# Altium PCB SPI LVDS Peripheral.PcbDoc
Units mil, origin at the board's own origin, x right, y up, seen from the top; angles counter-clockwise.
Board outline 2032.72 x 1617.57 mil, 4 copper layers (Top Layer, L2 - GND, L3 - GND, Bottom Layer), stack 61.811 mil thick; 29 components, 19 nets, 94 pads, 97 vias.
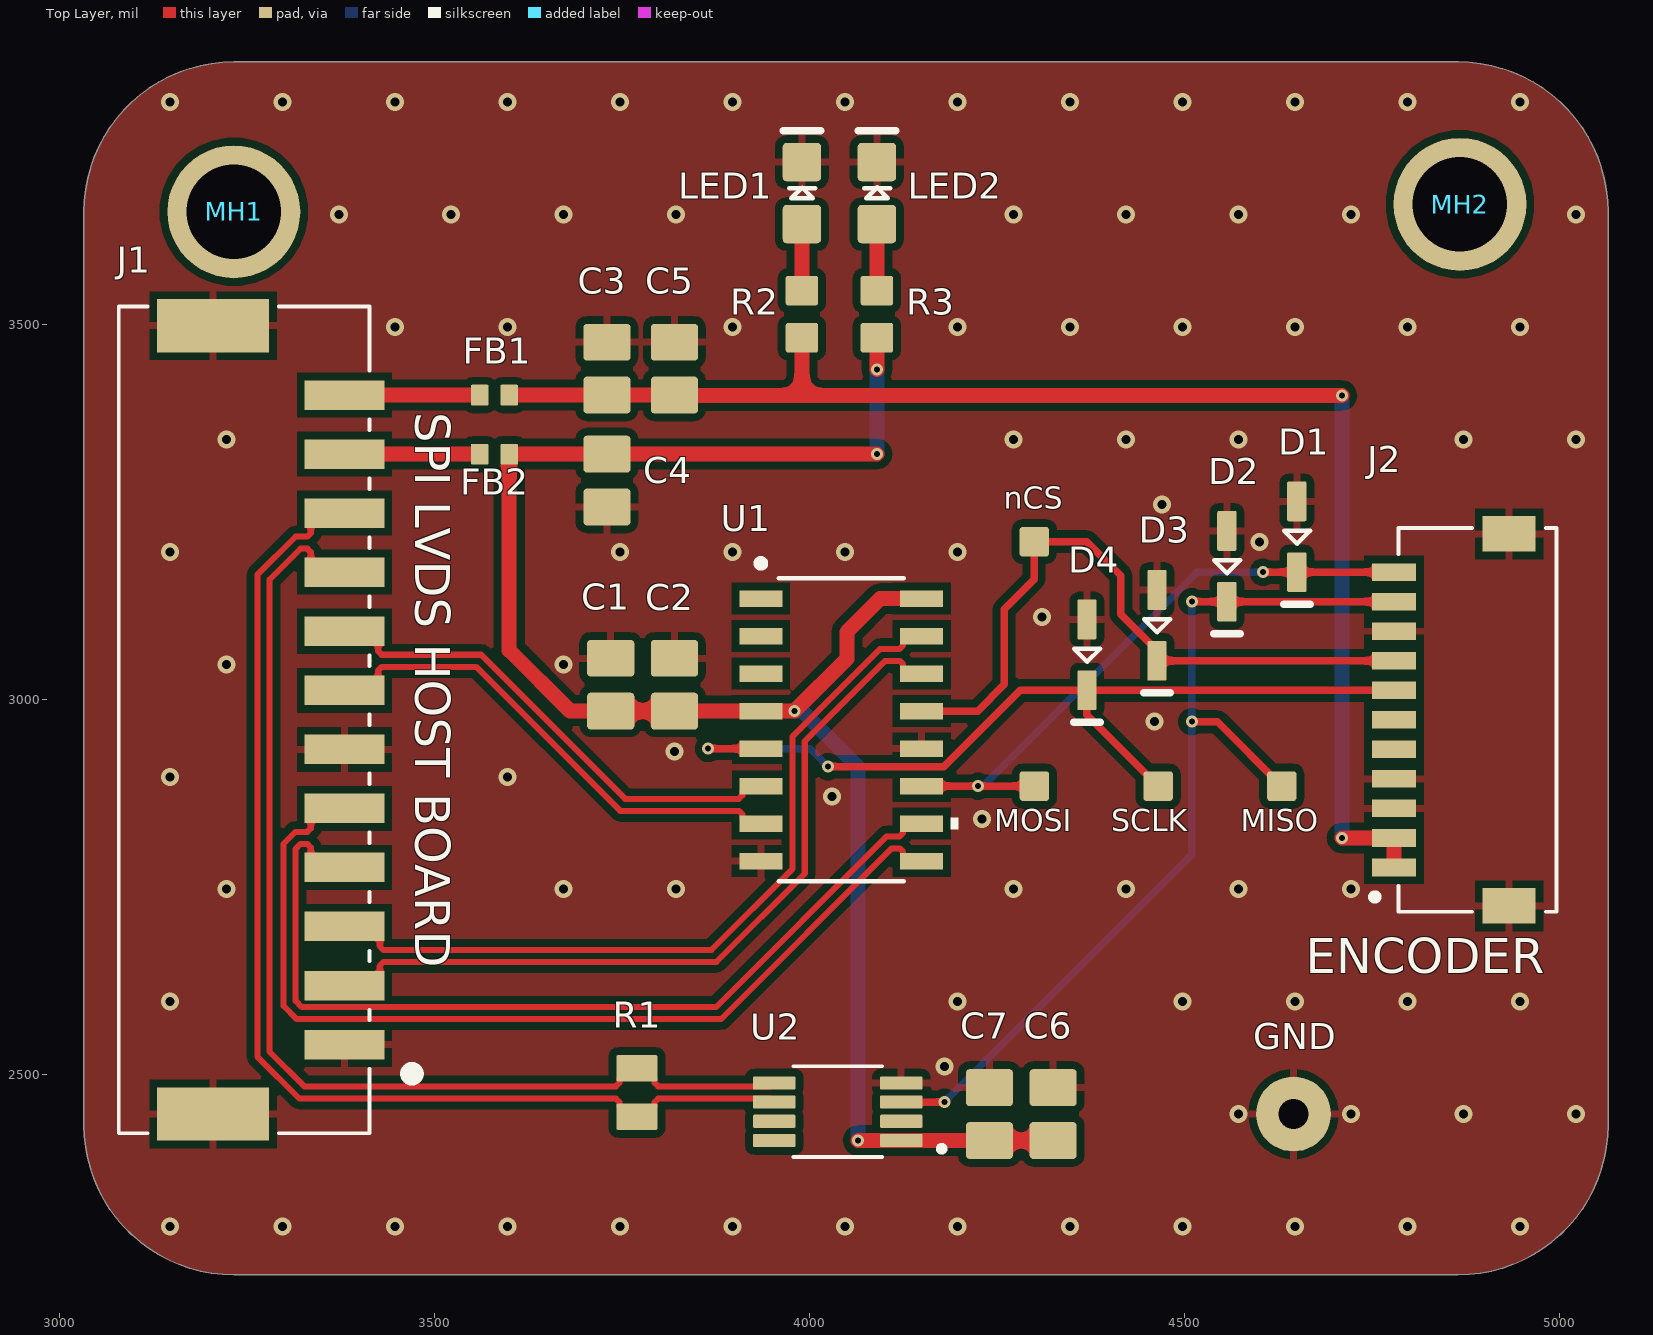
[diagram p0: Top Layer view]
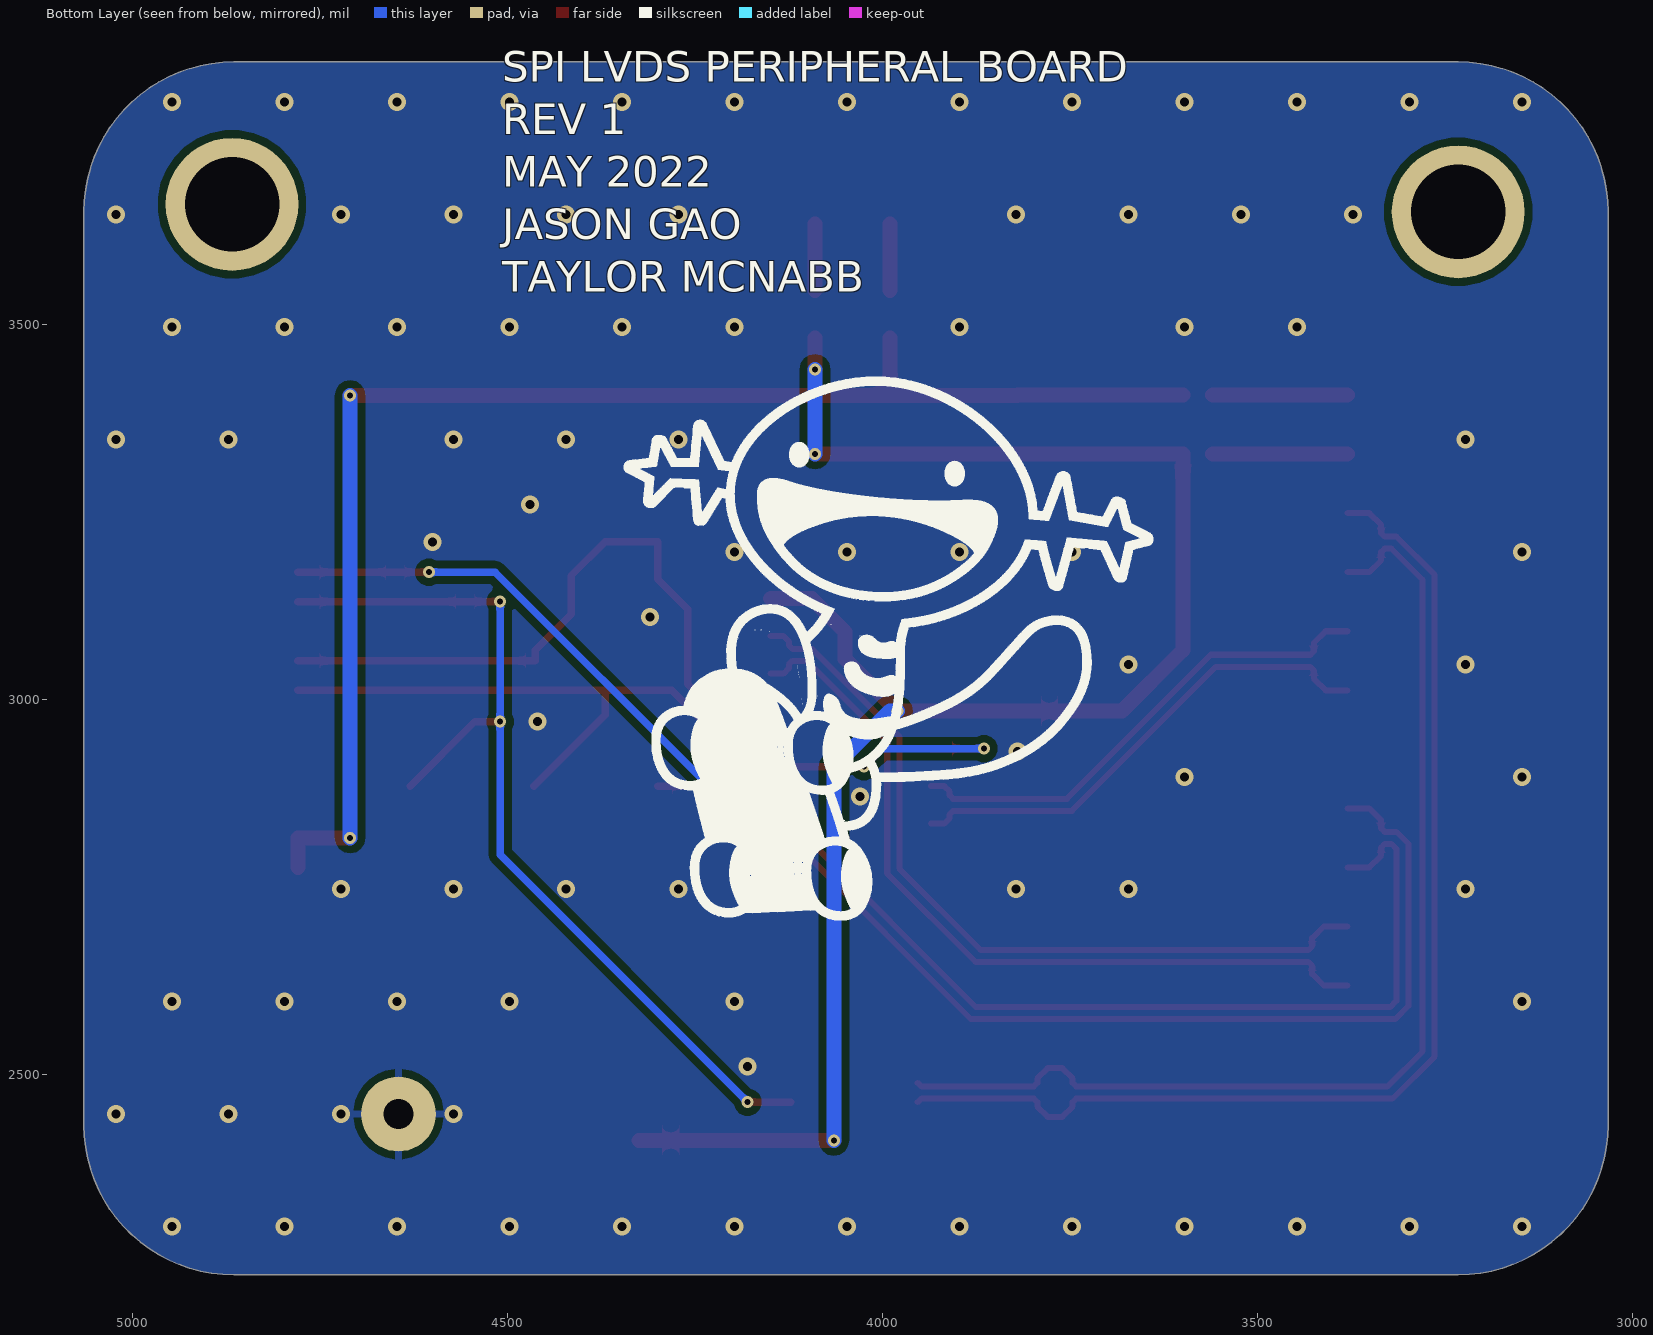
[diagram p1: Bottom Layer view, seen from below]
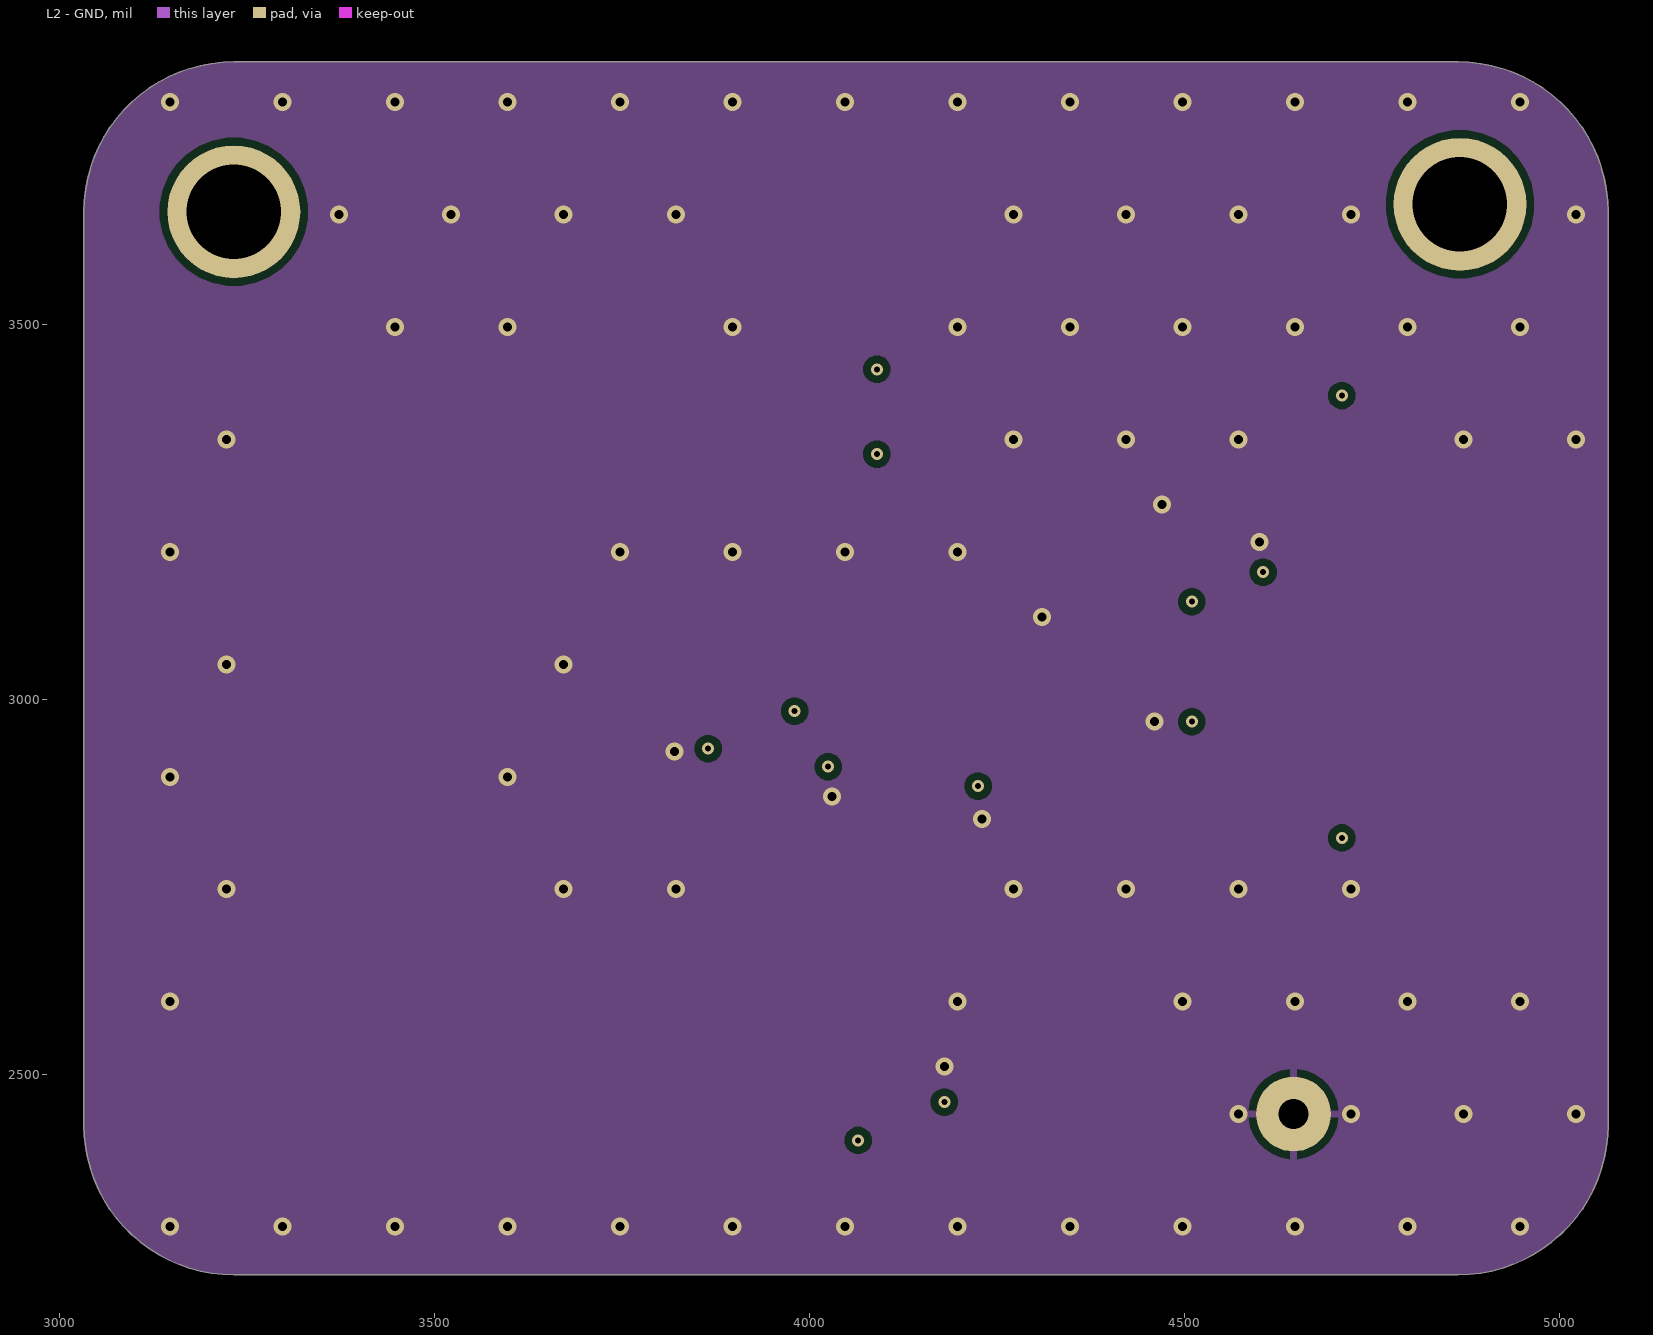
[diagram p2: L2 - GND]
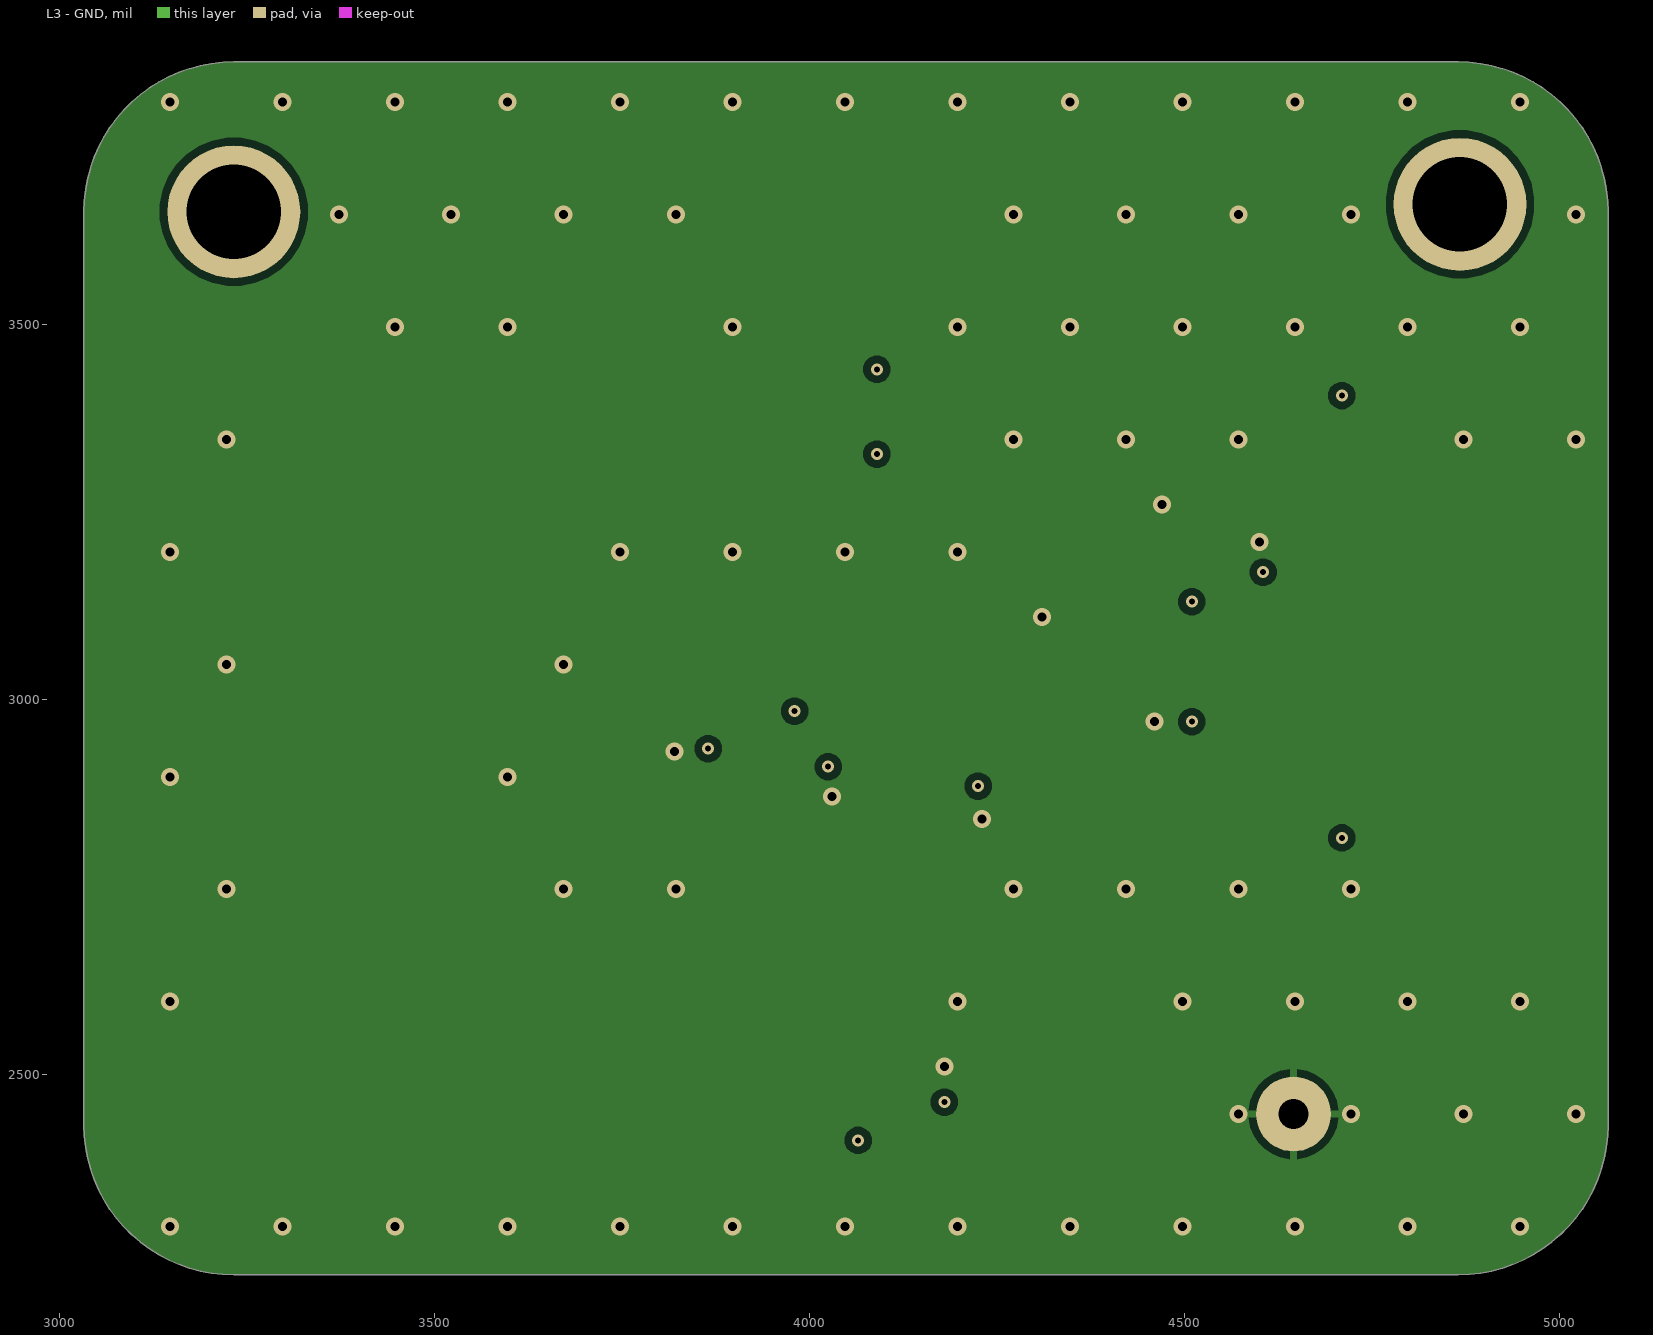
[diagram p3: L3 - GND]
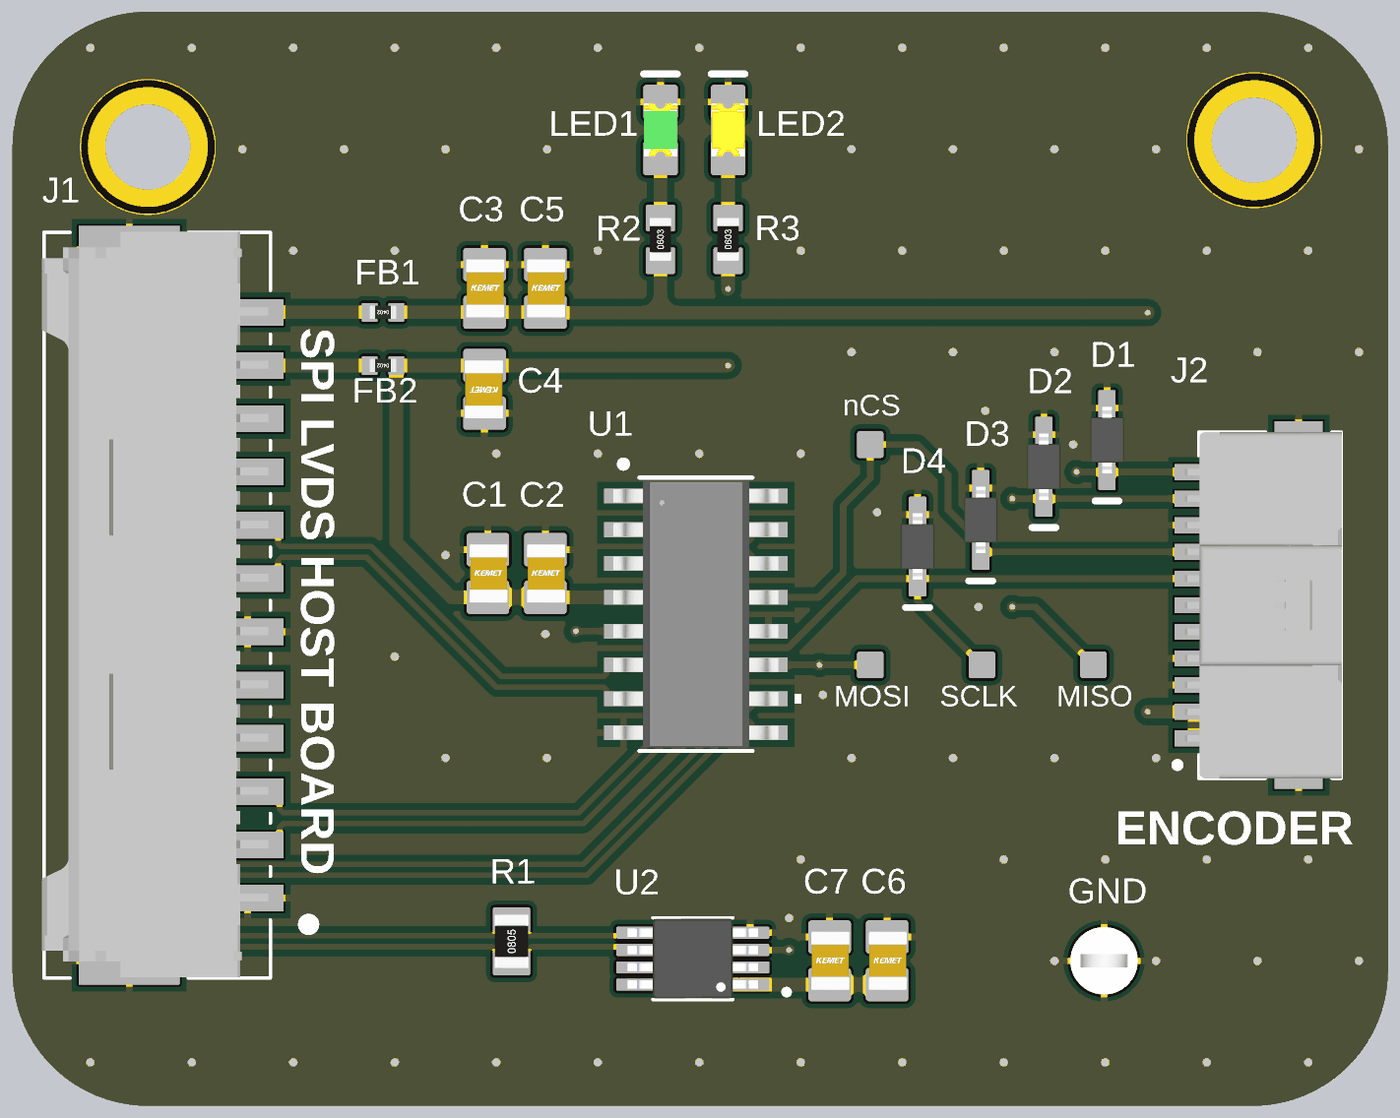
[diagram p4: 3D render of the assembled board from above, using the file's embedded part models]

## Layer stack, top to bottom
Top Solder: solder mask 0.5, Solder Resist, Dk 3.8
Top Layer: signal copper 1.378
Dielectric 1: prepreg 7.874, 7628, Dk 4.6
L2 - GND: signal copper 0.689
Core: core 41.929, FR-4, Dk 4.5
L3 - GND: signal copper 0.689
Dielectric 2: prepreg 7.874, 7628, Dk 4.6
Bottom Layer: signal copper 1.378
Bottom Solder: solder mask 0.5, Solder Resist, Dk 3.8

## Board outline
3032.43,2432.43 3032.43,3650 cw(c3232.43,3650) 3232.43,3850 4865.15,3850 cw(c4865.15,3650) 5065.15,3650 5065.15,2432.43 cw(c4865.15,2432.43) 4865.15,2232.43 3232.43,2232.43 cw(c3232.43,2432.43)

## Design rules (kind name [scope] priority, off if disabled: settings)
Clearance "Stitching No Net_1" [IsStitchingVia and InNet('No Net') vs (IsVia and (Not IsStitchingVia)) Or IsPad] p1: gap=5 ignorepadtopadclearanceinfootprint=FALSE
Clearance "Stitching No Net" [IsStitchingVia and InNet('No Net') vs (IsVia and (Not IsStitchingVia)) Or IsPad] p2: gap=5 ignorepadtopadclearanceinfootprint=FALSE
Clearance Clearance_Differential [InAnyDifferentialPair] p3: gap=10 ignorepadtopadclearanceinfootprint=FALSE except(0: Arc-Hole Track-Hole SMDPad-Hole THPad-Hole Via-Hole Fill-Hole Poly-Hole Region-Hole Text-Hole; 5: Arc-Arc Arc-Track Arc-SMDPad Track-Track Track-SMDPad SMDPad-SMDPad)
Clearance [All] p4: gap=10 ignorepadtopadclearanceinfootprint=FALSE except(0: Arc-Hole Track-Hole SMDPad-Hole THPad-Hole Via-Hole Fill-Hole Poly-Hole Region-Hole Text-Hole; 5: Arc-SMDPad Track-SMDPad SMDPad-SMDPad)
DiffPairsRouting [All] p1: maxlimit=8 minlimit=8 mostfreqgap=8 toplayer_minwidth=8.08 toplayer_maxwidth=8.08 toplayer_prefwidth=8.08 midlayer1_minwidth=8.08 midlayer1_maxwidth=8.08 midlayer1_prefwidth=8.08 midlayer2_minwidth=8.08 midlayer2_maxwidth=8.08 midlayer2_prefwidth=8.08 bottomlayer_minwidth=8.08 bottomlayer_maxwidth=8.08 bottomlayer_prefwidth=8.08 maxuncoupledlength=500
HoleSize [All] p1: absolutevalues=TRUE maxlimit=200 minlimit=1 maxpercent=80.000 minpercent=20.000
MinimumSolderMaskSliver [All] p1: minsoldermaskwidth=6
PolygonConnect [All] p1: thpad.connectstyle=Relief thpad.reliefconductorwidth=10 thpad.reliefentries=4 thpad.polygonreliefangle="90 Angle" thpad.airgapwidth=10 smdpad.connectstyle=Relief smdpad.reliefconductorwidth=10 smdpad.reliefentries=4 smdpad.polygonreliefangle="90 Angle" smdpad.airgapwidth=10 via.connectstyle=Direct via.reliefconductorwidth=10 via.reliefentries=4 via.polygonreliefangle="90 Angle" via.airgapwidth=10
RoutingVias [All] p1: holewidth=28 width=50 viastyle="Through Hole" minholewidth=8 minwidth=16 maxholewidth=28 maxwidth=50
SilkToSilkClearance [All] p1: silktosilkclearance=6
SilkToSolderMaskClearance [IsPad] p1: minsilkscreentomaskgap=1 clearancetoexposedcopper=TRUE
SolderMaskExpansion [All] p1: expansion=4 istentingtop=FALSE
Width "Power Width" [InNet('3V3') Or InNet('5V')] p1: maxlimit=20 minlimit=20 preferedwidth=20
Width [All] p2: maxlimit=100 minlimit=10 preferedwidth=10
25 further rules are at their usual default settings.

## Classes and differential pairs
differential pair SCLK: +SCLK_P -SCLK_N
differential pair nCS: +nCS_P -nCS_N
differential pair MOSI: +MOSI_P -MOSI_N
differential pair MISO: +MISO_P -MISO_N

## Components (designator, comment, footprint, x,y, rotation, side; value= is the part's Value field where it differs from the comment)
C1 "CAP_1000pF_50V_0805" CAP2012 3735,3019.42 r270 top value=1000pF
C2 "CAP_0.1uF_50V_0805" CAP2012 3820,3019.42 r270 top value=0.1μF
C3 "CAP_0.1uF_50V_0805" CAP2012 3730,3440.88 r270 top value=0.1μF
C4 "CAP_0.1uF_50V_0805" CAP2012 3730,3291.67 r90 top value=0.1μF
C5 "CAP_0.1uF_50V_0805" CAP2012 3820,3440.88 r270 top value=0.1μF
C6 "CAP_1000pF_50V_0805" CAP2012 4325,2446.85 r270 top value=1000pF
C7 "CAP_0.1uF_50V_0805" CAP2012 4240,2446.85 r270 top value=0.1μF
D1 "TVS_DIODE_UNIDIR_5V" SOD-323 4650,3216.67 r270 top
D2 "TVS_DIODE_UNIDIR_5V" SOD-323 4556.67,3177.3 r270 top
D3 "TVS_DIODE_UNIDIR_5V" SOD-323 4463.33,3098.56 r270 top
D4 "TVS_DIODE_UNIDIR_5V" SOD-323 4370,3059.19 r270 top
FB1 "FERRITE_BEAD_600OHM_0402" RES0402 3580,3405.64 r180 top
FB2 "FERRITE_BEAD_600OHM_0402" RES0402 3580,3326.9 r180 top
GND "TESTPOINT_LOOP" TESTPOINT_LOOP 4645.55,2446.85 r0 top (schematic designator TP5)
J1 "CON_12M_SM_RA_2mm" MOLEX-5024941270 3375,2540.64 r90 top
J2 "CON_12M_SM_RA" MOLEX-5015681107 4880,2972.57 r90 top
LED1 "LED_GREEN" LED_0805_GREEN 3990,3675 r90 top
LED2 "LED_YELLOW" LED_0805_YELLOW 4090,3675 r90 top
MH1 "MOUNTING_HOLE_M3" MOUNTING_HOLE_3mm#1 3230,3650 r0 top
MH2 "MOUNTING_HOLE_M3" MOUNTING_HOLE_3mm#2 3965,3660 r0 top
MISO "TESTPOINT_1MM_SQUARE" TESTPOINT_SQUARE_1MM#1 4630,2884.18 r90 top (schematic designator TP3)
MOSI "TESTPOINT_1MM_SQUARE" TESTPOINT_SQUARE_1MM#2 4300,2885.56 r90 top (schematic designator TP4)
nCS "TESTPOINT_1MM_SQUARE" TESTPOINT_SQUARE_1MM#1 4300,3210 r90 top (schematic designator TP2)
R1 "RES_100Ω_0805_1%" RES0805 3770,2475.59 r90 top value=100Ω
R2 "RES_220Ω_0603_5%" RES0603 3990,3482.01 r90 top value=220Ω
R3 "RES_100Ω_0603_1%" RES0603 4090,3482.01 r90 top value=100Ω
SCLK "TESTPOINT_1MM_SQUARE" TESTPOINT_SQUARE_1MM#1 4465,2884.18 r90 top (schematic designator TP1)
U1 "SN65LVDS33MDREP" SOIC127P600X175-16N 4042.43,2959.18 r0 top
U2 "SN65LVDS179MDGKREP" SOP65P490X110-8N 4037.79,2450 r180 top

## Footprints (in the part's own frame and the unit in brackets; to place one, negate y for a bottom-side part, rotate by r counter-clockwise, add the part's x,y. Pads: shape width x height; smd on the part's side, far side on the other; paste and mask are expansions set on the pad)
CAP2012 [mm]
  rrect20% 1.25x1.6 smd: 1(-0.895,0) 2(0.895,0)
  body extent -1.1,-0.7 1.1,0.75, height 1.41
LED_0805_GREEN [mm] "SMD, 2-Leads, Body 2x1.25mm"
  rrect20% 1.3x1.3 smd: 1(-1.05,0) 2(1.05,0)
  silkscreen extent -0.18,-0.63 2.11,0.64, body extent -1,-0.62 1,0.63, height 1.12
LED_0805_YELLOW [mm] "SMD, 2-Leads, Body 2x1.25mm"
  rrect20% 1.3x1.3 smd: 1(-1.05,0) 2(1.05,0)
  silkscreen extent -0.18,-0.63 2.11,0.64, body extent -1,-0.62 1,0.63, height 1.12
MOLEX-5015681107 [mm]
  rect 0.6x1.5 smd mask+0: 1(-5,2.55) 2(-4,2.55) 3(-3,2.55) 4(-2,2.55) 5(-1,2.55) 6(0,2.55) 7(1,2.55) 8(2,2.55) 9(3,2.55) 10(4,2.55) 11(5,2.55)
  rect 1.2x1.8 smd mask+0: S1(6.3,-1.35) S2(-6.3,-1.35)
  silkscreen extent -6.5,-2.95 6.5,3.3, body extent -6.5,-2.98 6.5,2.93, height 4.61
MOLEX-5024941270 [mm]
  rect 1.8x3.8 smd paste+0 mask+0.076: 0(-2.379,4.323) 0(24.321,4.323)
  rect 1x2.7 smd paste+0 mask+0.076: 1(-0.029,-0.127) 2(1.971,-0.127) 3(3.971,-0.127) 4(5.971,-0.127) 5(7.971,-0.127) 6(9.971,-0.127) 7(11.971,-0.127) 8(13.971,-0.127) 9(15.971,-0.127) 10(17.971,-0.127) 11(19.971,-0.127) 12(21.971,-0.127)
  silkscreen extent -3.03,-2.61 24.97,7.52, body extent -3,-0.9 25,7.6, height 6.76
MOUNTING_HOLE_3mm#1 [mm] "3mm Hole"
  round 4.5 hole 3.2 mask+0.3: 0(0.062,0)
MOUNTING_HOLE_3mm#2 [mm] "3mm Hole"
  round 4.5 hole 3.2 mask+0.3: 0(22.925,0)
RES0402 [mm] "Chip Resistor, Body 1x0.5mm, IPC Medium Density"
  rrect15% 0.6x0.7 smd: 1(-0.5,0) 2(0.5,0)
  body extent -0.5,-0.25 0.5,0.25, height 0.27
RES0603 [mm] "Chip Resistor, Body 1.6x0.8mm, IPC Medium Density"
  rrect15% 1x1.1 smd: 1(0,0) 2(1.6,0)
  body extent 0,-0.4 1.6,0.4, height 0.46
RES0805 [mm] "Chip Resistor, 2-Leads, Body 2.00x1.25mm, IPC High Density"
  rrect15% 0.9x1.4 smd: 1(-0.825,0) 2(0.825,0)
  body extent -1,-0.62 1,0.63, height 0.61
SOD-323 [mm]
  rrect15% 1.35x0.65 smd: 1(-1.2,0) 2(1.2,0)
  silkscreen extent -0.21,-0.45 2.29,0.45, body extent -1.24,-0.62 1.24,0.62, height 1.1
SOIC127P600X175-16N [mil]
  rect 57.28x21.97 smd paste+0 mask+0: 1(-107.14,175) 2(-107.14,125) 3(-107.14,75) 4(-107.14,25) 5(-107.14,-25) 6(-107.14,-75) 7(-107.14,-125) 8(-107.14,-175) 9(107.14,-175) 10(107.14,-125) 11(107.14,-75) 12(107.14,-25) 13(107.14,25) 14(107.14,75) 15(107.14,125) 16(107.14,175)
  silkscreen extent -112,-202 156,227, body extent -122,-197 122,197, height 69
SOP65P490X110-8N [mm]
  rrect25% 1.45x0.45 smd: 1(-2.15,0.975) 2(-2.15,0.325) 3(-2.15,-0.325) 4(-2.15,-0.975) 5(2.15,-0.975) 6(2.15,-0.325) 7(2.15,0.325) 8(2.15,0.975)
  silkscreen extent -3.62,-1.54 1.5,1.54, body extent -2.45,-1.5 2.45,1.5, height 1.1
TESTPOINT_LOOP [mm]
  round 2.54 hole 1.02: 1(0,0)
  body extent -1.27,-1.27 1.27,1.27, height 4.57
TESTPOINT_SQUARE_1MM#1 [mm]
  rrect20% 1x1 smd: 1(0,0)
TESTPOINT_SQUARE_1MM#2 [mm]
  rrect20% 1x1 smd: 1(-0.035,0)

## Part data
C1 C6: "CAP CER 1000pF 50V X7R 0805", Dielectric=X7R, Manufacturer 1=Samsung, Manufacturer Part Number 1=CL21B102KBANNNC, Package/Footprint=0805, Supplier Part Number 1=1276-1020-1-ND, Voltage Rating=50V, Mounting Type=SMD, Supplier 1=Digi-Key
C2 C3 C4 C5 C7: "CAP CER 0.1UF 50V X7R 0805", Dielectric=X7R, LCSC Part #=C49678, Manufacturer 1=KEMET, Manufacturer Part Number 1=C0805C104K5RAC7411, Package/Footprint=0805, Supplier Part Number 1=80-C0805C104K5RACLR, Voltage Rating=50V, Mounting Type=SMD, Supplier 1=Mouser
D1 D2 D3 D4: "TVS DIODE 5VWM 12VC SOD-323-2", Clamping Voltage-Max=12V, Manufacturer 1=Nexperia, Manufacturer Part Number 1=PESD5V0L1UA, Min Breakdown Voltage="6.8 V", Supplier Part Number 1=771-PESD5V0L1UA115, Supplier 1=Mouser
FB1 FB2: "FIXED IND 1UH 3.8A 33 MOHM SMD", Current Rating (Max)=300mA, DC Resistance (DCR) (Max)=520mΩ, Impedance @ Frequency="600Ω @ 100 MHz", Manufacturer 1="TDK Corporation", Manufacturer Part Number 1=MMZ1005S601CT000, Package=0402, Package/Footprint=SMD, Supplier Part Number 1=445-2162-1-ND, Impedance=600Ω, Mounting Type=SMD, Supplier 1=Digi-Key
GND: "TESTPOINT THRUHOLE", Manufacturer 1="Keystone Electronics", Manufacturer Part Number 1=5002, Package/Footprint=TH, Supplier Part Number 1=36-5002-ND, Mounting Type=TH, Supplier 1=Digi-Key
J1: "2.00mm Pitch CLIK-Mate Wire-to-Board PCB Receptacle, Single Row, Right-Angle, 12 Circuits", Color=Natural,White, Contact Resistance=20mR, Current Rating=3A, Flammability Rating="UL94 V-0", Housing Color=Natural, Insulation Resistance=1GR, Manufacturer=Molex, Manufacturer Part Number=502494-1270, Max Operating Temperature=85°C, Max Voltage Rating (AC)=250V, Min Operating Temperature=-25°C, Package Quantity=950, Category="Headers and Wire Housings", Connector Type=Receptacle, Contact Gender=Female, Contact Material="Copper Alloy", Contact Plating=Tin, Contact Type="Center Strip Contact", Depth=6.85mm, Family=CLIK-Mate, Fastening Type=Latch, Gender=Receptacle, Glow Wire Compliant=Non-compliant, Housing Material=PBT, Lead Pitch=2mm, Length=28mm, Material=Polybutylene, Mating Cycles=30, Max Voltage Rating (DC)=250V, Mount="Surface Mount", Number of Circuits=12, Number of Contacts=12, Number of Positions=12, Number of Rows=1, Orientation="Right Angle", Packaging="Tape and Reel", Pitch=2mm, Pricing 1="950=0.62780, 1900=0.61060, 3800=0.56580, 5700=0.53600, 7600=0.52000 (USD)", Radiation Hardening=No, REACH SVHC=Unknown, RoHS=Yes, Series=502494, Stock 1=1900, Supplier 1=Mouser, Supplier Part Number 1=502494-1270, Termination=Solder, Voltage Rating (AC)=250V
J2: library part CON_11M_SM_RA, "CONN HEADER SMD RIGHT ANGLE 1MM PITCH", Package=None, Supplier Part Number 1=WM7902CT-ND, Availability=Unavailable, MP="Molex, 5015681107", Price=None, Supplier 1=Digi-Key
LED1: "LED GREEN DIFFUSED 0805 SMD", Forward Voltage Drop=2.2V, Manufacturer 1=OSRAM, Manufacturer Part Number 1="LG R971-KN-1", Package/Footprint=0805, Supplier Part Number 1=475-1410-1-ND, Mounting Type=SMD, Supplier 1=Digi-Key
LED2: "LED YELLOW DIFFUSED 0805 SMD", Forward Voltage Drop=2.2V, Manufacturer 1=OSRAM, Manufacturer Part Number 1="LY R976-PS-36", Package="0805 (2012 Metric)", Supplier Part Number 1=475-2560-1-ND, Supplier 1=Digi-Key
MISO MOSI nCS SCLK: "TESTPOINT 1MM SQUARE"
R1: "RES 100 OHM 1% 1/8W 0805", LCSC Part #=C1790, Manufacturer 1="ROHM Semiconductor", Manufacturer Part Number 1=SFR10EZPF1000, Package/Footprint=0805, Supplier Part Number 1=755-SFR10EZPF1000, Mounting Type=SMD, Supplier 1=Mouser
R2: "RES 220 OHM 5% 1/10W 0603", Manufacturer 1=Yageo, Manufacturer Part Number 1=AC0603JR-07220RL, Package/Footprint=0603, Supplier Part Number 1=YAG3652CT-ND, Supplier 1=Digi-Key
R3: "RES 100 OHM 1% 1/10W 0603", Manufacturer 1=Yageo, Manufacturer Part Number 1=RC0603FR-07100RL, Supplier Part Number 1=311-100HRCT-ND, Supplier 1=Digi-Key
U1: "IC RECEIVER 0/4 16SOIC", Package=None, Supplier Part Number 1=296-19498-1-ND, Availability=Unavailable, MP=SN65LVDS33MDREP, Price=None, Supplier 1=Digi-Key
U2: "Enhanced Product High-Speed Differential Line Drivers And Receivers 8-VSSOP -55 to 125", Package="VSSOP-8 Texas Instruments", Supplier Part Number 1=296-22243-1-ND, Digi-Key_Part_Number=296-22243-1-ND, MF="Texas Instruments", MP=SN65LVDS179MDGKREP, Purchase-URL=https://pricing.snapeda.com/search/part/SN65LVDS179MDGKREP/?ref=eda, SnapEDA_Link=https://www.snapeda.com/parts/SN65LVDS179MDGKREP/Texas%20Instruments/view-part/383554/?ref=snap, Supplier 1=Digi-Key

## Via types
v1: diameter 24, hole 12, Top Layer to Bottom Layer, tented both sides, 84 vias
v2: diameter 16, hole 8, Top Layer to Bottom Layer, tented both sides, 13 vias

## Nets (pads, with @x,y where several pads share a name; then routed paths per layer and width w, separated by ;. In a path a pad name is that pad's centre, name@x,y a point inside that pad or via, vN(x,y) a via of type N, cw(c..) or ccw(c..) an arc to the next point about the centre after c; other vN are vias at no path point)
3V3: C1.2 C2.2 C4.2 C6.2 C7.2 FB2.1 R3.1 U1.4 U1.16 U2.1 | length 2447.4
  Top Layer w20: v2(4065,2411.61) U2.1 C7.2 C6.2 ; v2(4090,3326.9) C4.2 FB2.1 3599.68,3065.32 3680.82,2984.18 C1.2 C2.2 U1.4 v2(3980.28,2984.18) 4050,3053.91 4050,3090 4094.18,3134.18 U1.16 ; v2(4090,3440) R3.1
  Bottom Layer w20: v2(3980.28,2984.18) 3990.41,2984.18 4065,2909.6 v2(4065,2411.61) ; v2(4090,3326.9) v2(4090,3440)
5V: C3.2 C5.2 FB1.1 J2.1 J2.2 R2.1 | length 1885.7
  Top Layer w20: FB1.1 C3.2 C5.2 ; C5.2@3820.63,3405.01 v2(4710,3405) ; 3990,3405.01 R2.1 ; v2(4710,2815) 4710.09,2815.09 J2.2 J2.1
  Bottom Layer w20: v2(4710,2815) v2(4710,3405)
GND: C1.1 C2.1 C3.1 C4.1 C5.1 C6.1 C7.1 D1.1 D2.1 D3.1 D4.1 GND.1 J1.0 J1.1 J1.6 J2.3 J2.4 J2.9 J2.S1 J2.S2 LED1.2 LED2.2 U1.8 U1.12 U2.4
  other v1: 3147.35,2296.65 3297.35,2296.65 3447.35,2296.65 3597.35,2296.65 3747.35,2296.65 3897.35,2296.65 4047.35,2296.65 4197.35,2296.65 4347.35,2296.65 4497.35,2296.65 4647.35,2296.65 4797.35,2296.65 4947.35,2296.65 4572.35,2446.65 4722.35,2446.65 4872.35,2446.65 5022.35,2446.65 4180,2510 3147.35,2596.65 4197.35,2596.65 4497.35,2596.65 4647.35,2596.65 4797.35,2596.65 4947.35,2596.65 3222.35,2746.65 3672.35,2746.65 3822.35,2746.65 4272.35,2746.65 4422.35,2746.65 4572.35,2746.65 4722.35,2746.65 4230,2840 4030,2870 3147.35,2896.65 3597.35,2896.65 3820,2930 4460,2970 3222.35,3046.65 3672.35,3046.65 4310,3110 3147.35,3196.65 3747.35,3196.65 3897.35,3196.65 4047.35,3196.65 4197.35,3196.65 4600,3210 4470,3260 3222.35,3346.65 4272.35,3346.65 4422.35,3346.65 4572.35,3346.65 4872.35,3346.65 5022.35,3346.65 3447.35,3496.65 3597.35,3496.65 3897.35,3496.65 4197.35,3496.65 4347.35,3496.65 4497.35,3496.65 4647.35,3496.65 4797.35,3496.65 4947.35,3496.65 3372.35,3646.65 3522.35,3646.65 3672.35,3646.65 3822.35,3646.65 4272.35,3646.65 4422.35,3646.65 4572.35,3646.65 4722.35,3646.65 5022.35,3646.65 3147.35,3796.65 3297.35,3796.65 3447.35,3796.65 3597.35,3796.65 3747.35,3796.65 3897.35,3796.65 4047.35,3796.65 4197.35,3796.65 4347.35,3796.65 4497.35,3796.65 4647.35,3796.65 4797.35,3796.65 4947.35,3796.65
MISO: D2.2 J2.10 MISO.1 U2.3 | length 1286.7
  Top Layer w10: U2.3 v2(4180,2462.8) ; v2(4510,2970) 4544.19,2970 MISO.1 ; v2(4510,3130.05) D2.2 J2.10
  Bottom Layer w10: v2(4180,2462.8) 4510,2792.8 v2(4510,2970) v2(4510,3130.05)
MISO_N: J1.10 R1.1 U2.6 | length 1540.8
  Top Layer w8.08: J1.10 3350.79,3248.16 3335.15,3232.52 3335.15,3221.57 3330.42,3216.83 3314.69,3216.83 3263.92,3166.06 3263.92,2523.34 3319.71,2467.55 3741.75,2467.55 3746.48,2462.82 3746.48,2456.79 3760.16,2443.11 R1.1 3779.84,2443.11 3793.52,2456.79 3793.52,2462.82 3798.25,2467.55 3948.39,2467.55 U2.6
MISO_P: J1.9 R1.2 U2.5 | length 1487.6
  Top Layer w8.08: J1.9 3350.79,3169.42 3335.15,3185.07 3335.15,3196.02 3330.42,3200.75 3321.36,3200.75 3280,3159.4 3280,2530 3326.37,2483.63 3741.75,2483.63 3746.48,2488.36 3746.48,2494.39 3760.16,2508.07 R1.2 3779.84,2508.07 3793.52,2494.39 3793.52,2488.36 3798.25,2483.63 3948.39,2483.63 U2.5
MOSI: D1.2 J2.11 MOSI.1 U1.11 | length 823.2
  Top Layer w10: U1.11 v2(4225,2884.18) MOSI.1 ; v2(4605,3169.42) D1.2 J2.11
  Bottom Layer w10: v2(4225,2884.18) 4226.15,2885.33 4232.75,2885.33 4516.84,3169.42 v2(4605,3169.42)
MOSI_N: J1.5 U1.9 | length 1286
  Top Layer w8.08: J1.5 3350.79,2854.46 3335.15,2838.82 3335.15,2827.87 3330.42,2823.13 3314.69,2823.13 3298.65,2807.09 3298.65,2591.23 3316.45,2573.44 3882.05,2573.44 4109.76,2801.14 4120.23,2801.14 4124.97,2796.41 4124.97,2791.13 4131.91,2784.18 U1.9
MOSI_P: J1.4 U1.10 | length 1232.7
  Top Layer w8.08: J1.4 3350.79,2775.72 3335.15,2791.37 3335.15,2802.32 3330.42,2807.05 3321.36,2807.05 3314.73,2800.43 3314.73,2597.89 3323.11,2589.52 3875.39,2589.52 4103.1,2817.22 4120.23,2817.22 4124.97,2821.96 4124.97,2827.24 4131.91,2834.18 U1.10
nCS: D3.2 J2.8 nCS.1 U1.13 | length 915.5
  Top Layer w10: U1.13 4224.18,2984.18 4260,3020 4260,3120 4300,3160 nCS.1 4370,3210 4415,3165 4415,3113.43 4463.33,3065.09 D3.2 J2.8
nCS_N: J1.3 U1.15 | length 1068.7
  Top Layer w8.08: J1.3 3411.57,2696.98 3427.22,2681.34 3427.22,2670.39 3431.95,2665.65 3869.16,2665.65 3977.68,2774.17 3977.68,2950.42 4094.48,3067.22 4120.23,3067.22 4124.97,3071.96 4124.97,3077.24 4131.91,3084.18 U1.15
nCS_P: J1.2 U1.14 | length 1068.7
  Top Layer w8.08: J1.2 3411.57,2618.24 3427.22,2633.89 3427.22,2644.84 3431.95,2649.57 3875.82,2649.57 3993.76,2767.51 3993.76,2943.76 4101.14,3051.14 4120.23,3051.14 4124.97,3046.41 4124.97,3041.13 4131.91,3034.18 U1.14
NetFB1_2: FB1.2 J1.12 | length 180.3
  Top Layer w20: J1.12 FB1.2
NetFB2_2: FB2.2 J1.11 | length 180.3
  Top Layer w20: J1.11 FB2.2
NetLED1_1: LED1.1 R2.2 | length 88.7
  Top Layer w20: R2.2 LED1.1
NetLED2_1: LED2.1 R3.2 | length 88.7
  Top Layer w20: R3.2 LED2.1
SCLK: D4.2 J2.7 SCLK.1 U1.5 | length 1204.2
  Top Layer w10: v2(3865,2934.18) U1.5 ; v2(4025,2910) 4179.15,2910 4281.09,3011.94 D4.2 ; SCLK.1 4370,2979.18 D4.2 ; J2.7 D4.2
  Bottom Layer w10: v2(3865,2934.18) 4000.82,2934.18 v2(4025,2910)
SCLK_N: J1.7 U1.7 | length 664.4
  Top Layer w8.08: J1.7 3409.21,3011.94 3424.85,3027.59 3424.85,3038.54 3429.58,3043.27 3555.64,3043.27 3747.77,2851.14 3905.95,2851.14 3910.69,2846.41 3910.69,2841.13 3917.63,2834.18 U1.7
SCLK_P: J1.8 U1.6 | length 664.4
  Top Layer w8.08: J1.8 3409.21,3090.68 3424.85,3075.04 3424.85,3064.09 3429.58,3059.35 3562.3,3059.35 3754.43,2867.22 3905.95,2867.22 3910.69,2871.96 3910.69,2877.24 3917.63,2884.18 U1.6
pads on no net: J2.5 J2.6 MH1.0 MH2.0 U1.1 U1.2 U1.3 U2.2 U2.7 U2.8

## Polygon pours and split planes (outlines as drawn)
GND on Bottom Layer "GND_L04_P02" (solid, remove dead copper, pour order 10): 3032.43,2432.43 3032.43,3650 cw(c3232.43,3650) 3232.43,3850 4865.15,3850 cw(c4865.15,3650) 5065.15,3650 5065.15,2432.43 cw(c4865.15,2432.43) 4865.15,2232.43 3232.43,2232.43 cw(c3232.43,2432.43)
GND on L2 - GND "GND_L02_P03" (solid, pour order 11): 3032.43,2432.43 3032.43,3650 cw(c3232.43,3650) 3232.43,3850 4865.15,3850 cw(c4865.15,3650) 5065.15,3650 5065.15,2432.43 cw(c4865.15,2432.43) 4865.15,2232.43 3232.43,2232.43 cw(c3232.43,2432.43)
GND on L3 - GND "GND_L03_P04" (solid, pour order 12): 3032.43,2432.43 3032.43,3650 cw(c3232.43,3650) 3232.43,3850 4865.15,3850 cw(c4865.15,3650) 5065.15,3650 5065.15,2432.43 cw(c4865.15,2432.43) 4865.15,2232.43 3232.43,2232.43 cw(c3232.43,2432.43)
GND on Top Layer "GND_L01_P01" (solid, pour order 9): 3032.43,2432.43 3032.43,3650 cw(c3232.43,3650) 3232.43,3850 4865.15,3850 cw(c4865.15,3650) 5065.15,3650 5065.15,2432.43 cw(c4865.15,2432.43) 4865.15,2232.43 3232.43,2232.43 cw(c3232.43,2432.43)

## Silkscreen, mask and mechanical layers (free items; w line width, h text height)
Top Overlay:
  text "SPI LVDS HOST BOARD" at 3458.94,3382.97 h80 r270
  text "ENCODER" at 4661.81,2618.94 h80
Bottom Overlay:
  drawing of 55 lines, arcs and shapes, not listed
  text "SPI LVDS PERIPHERAL BOARD / REV 1 / MAY 2022 / JASON GAO / TAYLOR MCNABB" at 4507.5,3530 h70
Mechanical 1:
  lines w50: 5065.15,3650 ccw(c4865.15,3650) 4865.15,3850 3232.43,3850 ccw(c3232.43,3650) 3032.43,3650 3032.43,2432.43 ccw(c3232.43,2432.43) 3232.43,2232.43 4865.15,2232.43 ccw(c4865.15,2432.43) 5065.15,2432.43 5065.15,3661.16

## Text inside footprints (layer, text, board x,y; h text height)
U1: Mechanical 13 "*" at 3966.43,3103.18 h50